# Altium PCB BMS_Slavee.PcbDoc (part 2 of 4)
Units mm, origin at the board's own origin, x right, y up, seen from the top; angles counter-clockwise.
Board outline 197.87 x 123.44 mm, 2 copper layers (Top Layer, Bottom Layer); 344 components, 178 nets, 953 pads, 755 vias.
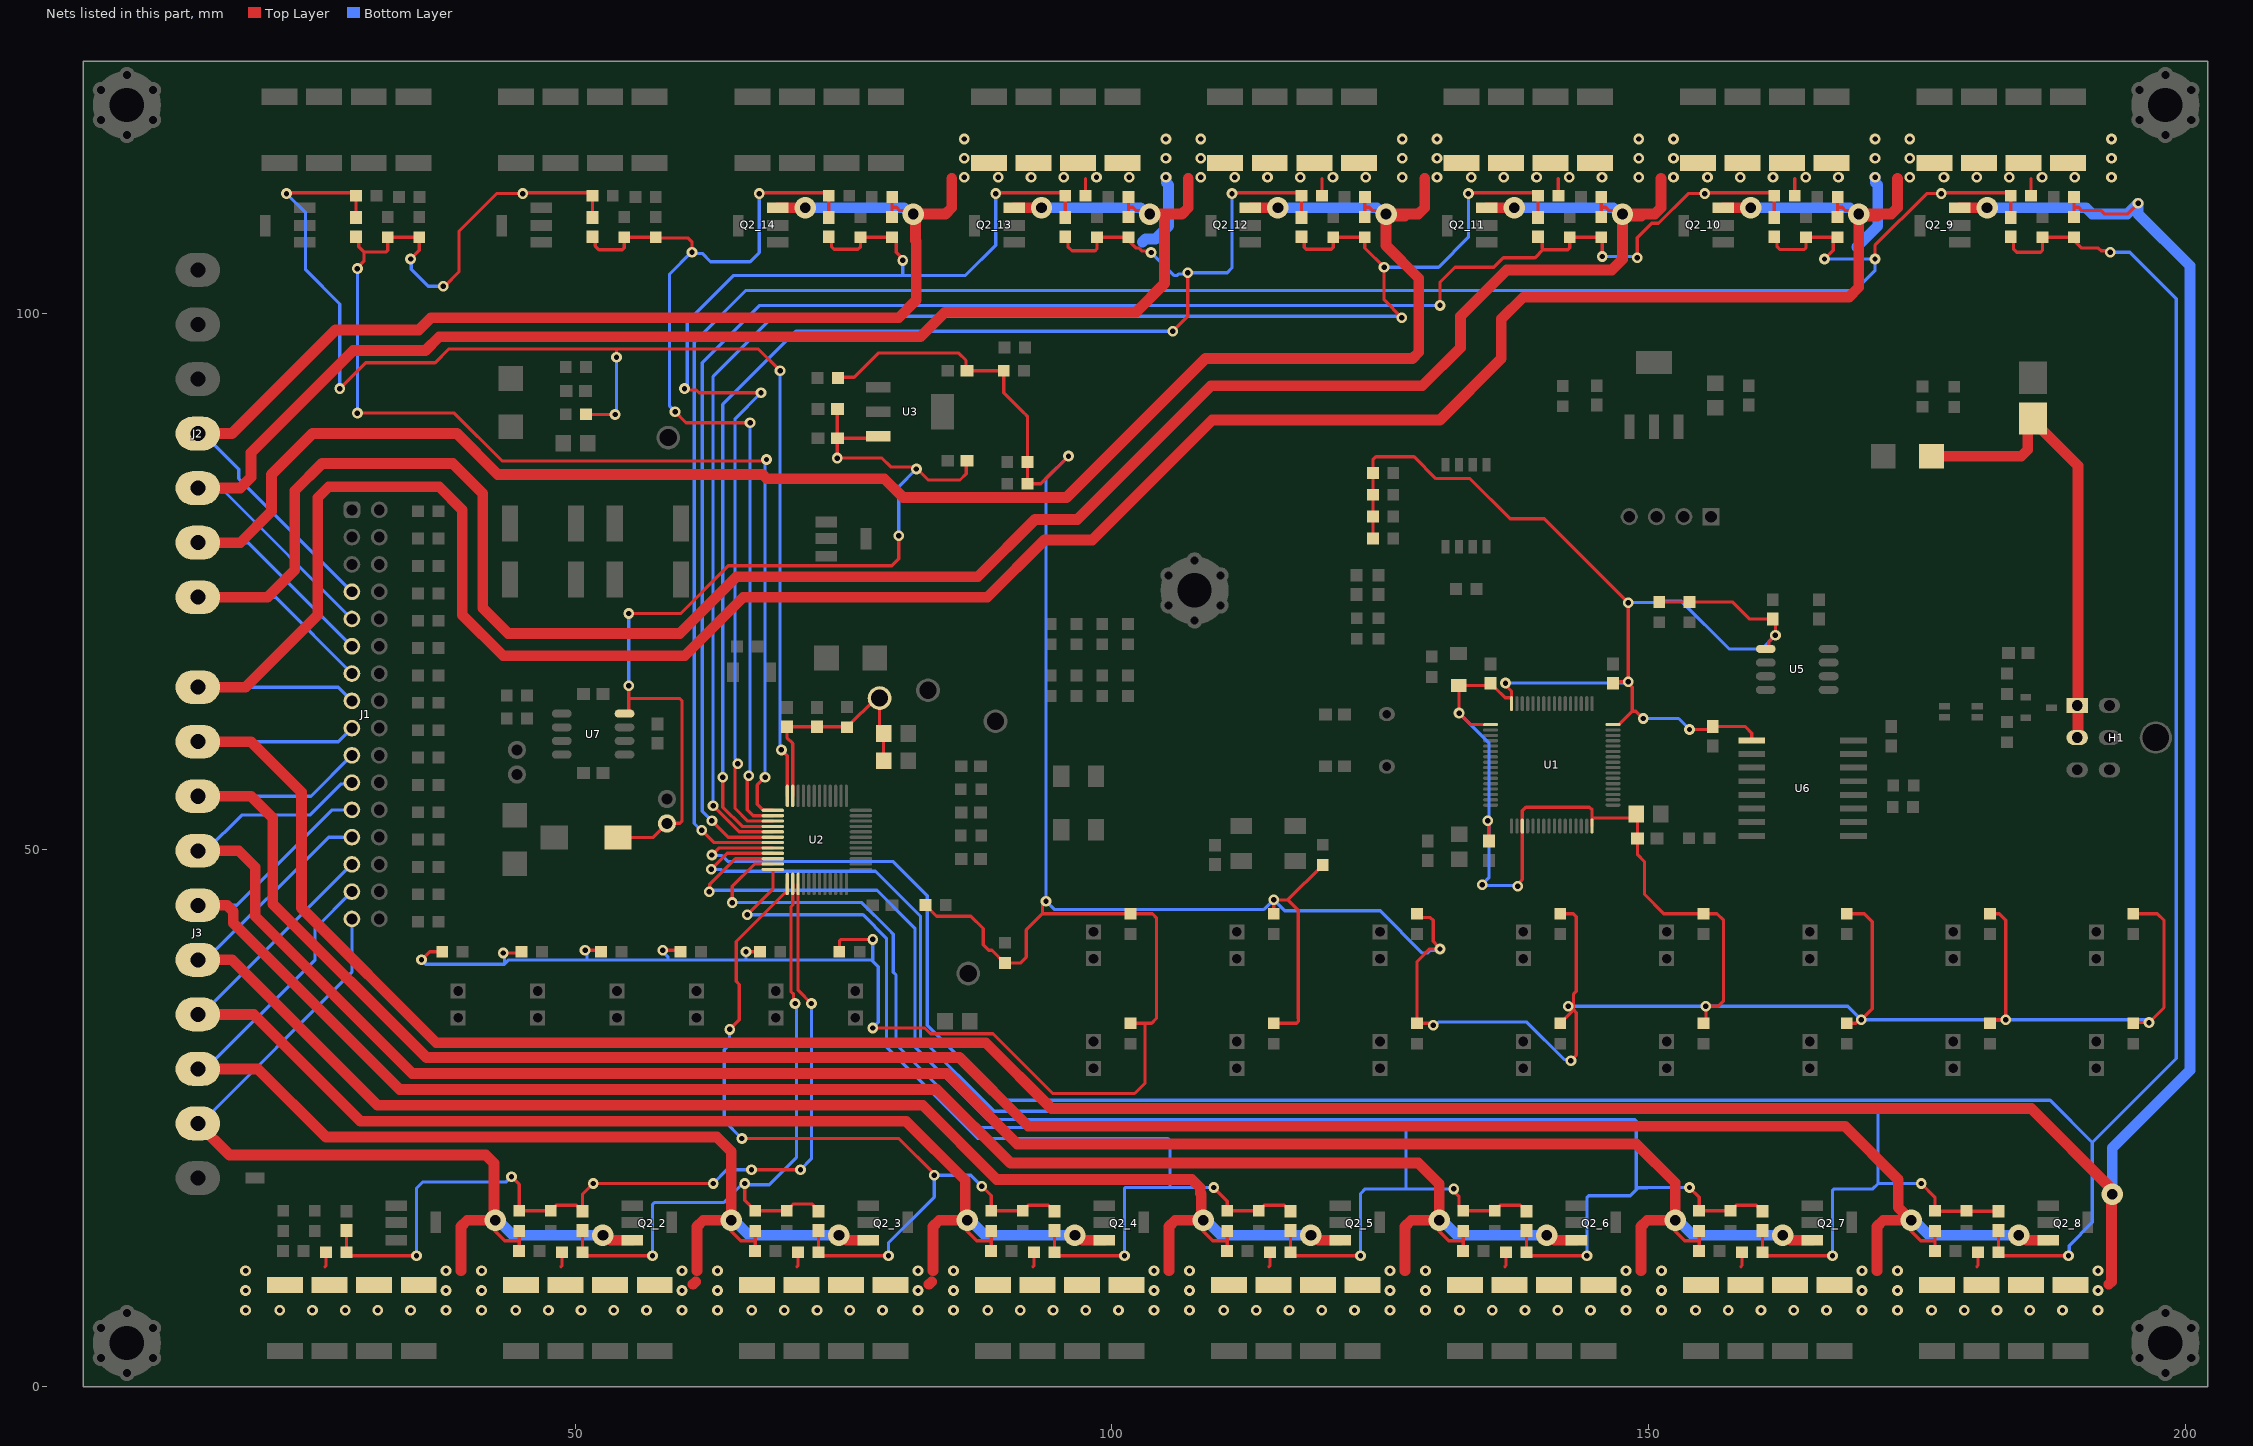
[diagram p2: the nets of this part, all layers, seen from the top]

## Part data
C1 C2 C3 C4 C5 C6 C8 C9 C10 C11 C12 C13 C14 C15 C16 C17 C18 C19 C20 C21 C22 C23 C24 C25_1 C25_2 C25_3 C25_4 C25_5 C25_6 C25_7 C25_8 C25_9 C25_10 C25_11 C25_12 C25_13 C25_14 C25_15 C25_16 C26 C27 C28 C29 C30 C31 C32 C39 C40 C41: library part Capacitor, "Capacitor", Published=8-Jun-2000, Publisher="Altium Limited"
  C1 C2 C3 C4 C5 C6 C8 C9 C10 C11 C12 C13 C14 C15 C16 C17 C18 C19 C20 C21 C22 C23 C24 C25_1 C25_2 C25_3 C25_4 C25_5 C25_6 C25_7 C25_8 C25_9 C25_10 C25_11 C25_12 C25_13 C25_14 C25_15 C25_16 C26 C27 C29 C30 C31 C32 C39 C40 C41: LatestRevisionDate=17-Jul-2002, LatestRevisionNote="Re-released for DXP Platform.", PackageReference=C0805
  C28: LatestRevisionDate=29-May-2009, LatestRevisionNote="IPC-7351 Footprint Added.", PackageDescription="Chip Capacitor", PackageReference=C1206
C7 C36: library part Capacitor, "100nF-0603", LatestRevisionDate=17-Jul-2002, LatestRevisionNote="Re-released for DXP Platform.", PackageReference=C0805, Published=8-Jun-2000, Publisher="Altium Limited"
C33 C34: library part "CAP 5*11"
C35: library part Capacitor, "1uF-0603", LatestRevisionDate=17-Jul-2002, LatestRevisionNote="Re-released for DXP Platform.", PackageReference=C0805, Published=8-Jun-2000, Publisher="Altium Limited"
C37 C38: library part Cap_Tan, "Tantalium Capacitor Size C", LatestRevisionDate=17-Jul-2002, LatestRevisionNote="Re-released for DXP Platform.", PackageReference=C0805, Published=8-Jun-2000, Publisher="Altium Limited"
D1 D2 D7: library part SS36
D3: library part CMP-0005740-3, "Diode, Zener, 4.7 V, 500 mW", Manufacturer="ON Semiconductor", PartNumber=MMSZ4697T1G, Power_W=500mW, Value1=0.5W, AEC Category=Q101, AEC Qualified=?, ComponentLink1Description="Datasheet link", ComponentLink1URL=http://www.onsemi.com/pub_link/Collateral/MMSZ4678T1-D.PDF, CompType=Zener, MountType=SMT, PackageReference=SOD-123, RJA_CperW=340, RoHS=Y, SizeArea_mm2=6.545, SizeAreaWB_mm2=13.095, SizeX_mm=3.85, SizeY_mm=1.7, SizeZ_mm=1.35, Vz_V=10V
D4: library part TVS, "transiebt voltage suppressor"
D8: library part SMBJ14ALK, "ESD protection diode / TVS diodes"
D9: library part SS34, "SS36 -Jled", Code_JEDEC=DO-214-AA, LatestRevisionDate=17-Jul-2002, LatestRevisionNote="Re-released for DXP Platform.", PackageReference=SMB, Published=8-Jun-2000, Publisher="Altium Limited"
H1: library part "HDR_mini_2 × 3", "Male Header 2X03"
J1: library part "Header 2*16 LED", "Header 2*16 LED 2mm"
J2: library part CONN_TB7, "CONN, TERMINAL BLOCK, 5.08mm pitch"
J3: library part CONN_TB10, "CONN, TERMINAL BLOCK, 5.08mm pitch"
L1: library part INDUCTOR, Code_IEC=1005, Code_JEITA=0402, LatestRevisionDate=17-Jul-2002, LatestRevisionNote="Re-released for DXP Platform.", PackageReference=0402-A, Published=8-Jun-2000, Publisher="Altium Limited"
L2: library part "line filter CMP-08256-000003-1", "CMC 200UH 70MA 2LN SMD", Impedance At Frequency="9.5kΩ @ 10MHz", Inductance=200uH, Manufacturer=TDK, Package=ACT1210L, Rms Current=70mA, Series Resistance=5.5Ω, Temperature="-40°C to +125°C", Temperature Range High=+125°C, Temperature Range Low=-40°C, Test Frequency=100kHz, Tolerance=-10/30%, Automotive=Yes, Automotive Grade="Grade 1", Category=Ind, ComponentLink2Description=Datasheet, ComponentLink2URL=https://product.tdk.com/info/en/catalog/datasheets/cmf_automotive_signal_act1210l-201_en.pdf, Composition=Wirewound, Device Class L1="Passive Components", Device Class L2="EMI / RFI Components", Device Class L3="Common Mode Chokes", Digikey Description="CMC 200UH 70MA 2LN SMD", Height=2.5mm, Lead Free=Yes, Manufacturer Part Number=ACT1210L-201-2P-TL00, Mouser Description="Ind Common Mode Choke 200uH 9.5KOhm 70mA 5.5Ohm -10% to 30% Wirewound 4-Pin 1210", Octopart=https://octopart.com/act1210l-201-2p-tl00-tdk-81014617, RoHS=TRUE
L3: library part "INDUCTOR 7*7"
LED1 LED2 LED3 LED4 LED5 LED6: library part LED, "LED", Adding Date=1387/12/22, Color=Red, Designer="Saeid Jorablo", Organazation=ControTec, Size="SMD 0603"
M1 M2 M3 M4 M5: library part MOUNTING
NT1: "Single point connection between nets.", Manufacturer=N/A, CompType=Net-Tie, MountType=SMT, PackageReference=N/A, PartNumber=N/A
PB1 RST1: library part Swtich-PB4, "4-Pin Push Button"
Q1 Q2_1 Q2_2 Q2_3 Q2_4 Q2_5 Q2_6 Q2_7 Q2_8 Q2_9 Q2_10 Q2_11 Q2_12 Q2_13 Q2_14 Q2_15 Q2_16: library part "BSR14, Nexperia", "BJT 30V 3A 40V 10W SI-NPN", Manufacturer=Nexperia, PartNumber=BSR14, Supplier Part Number 1=568-6225-1-ND, Value1="0.8 A", Value2=300, AEC Category=Q101, AEC Qualified=?, ComponentLink1Description="Datasheet link", ComponentLink1URL=http://www.nexperia.com/documents/data_sheet/BSR13_BSR14.pdf, CompType=BJT, HfeMax=300, IcRated_A=0.8, LatestRevisionDate=2017-06-09, MountType=SMT, NPN=1, PackageReference=SOT-23, PNP=0, Published=2008-07-31, Publisher="Texas Instruments", RoHS=Y, SizeArea_mm2=7.5, SizeAreaWB_mm2=14, SizeX_mm=2.5, SizeY_mm=3, SizeZ_mm=1.1, Supplier 1=Digi-Key, SymbolVersion=2008-07-31, TaMax_C=150, TaMin_C=-65, U/M=EA, Vceo_V=40, Vcesat1_V=0.3
R1 R2 R29 R34 R35 R36 R37 R38 R39 R48 R49 R50 R51 R54 R56 R57 R58 R64 R65 R70: library part Res, "Resistor", LatestRevisionDate=17-Jul-2002, LatestRevisionNote="Re-released for DXP Platform.", PackageDescription="Axial Device, Thru-Hole; 2 Leads; 0.3 in Pin Spacing", PackageReference=AXIAL-0.3, Published=8-Jun-2000, Publisher="Altium Limited"
R3 R4 R5 R6 R7 R8 R9 R10 R11 R12 R13 R14 R15 R16 R17 R18 R19 R20 R21 R22 R23 R24 R25 R26 R27 R28 R40_1 R40_2 R40_3 R40_4 R40_5 R40_6 R40_7 R40_8 R40_9 R40_10 R40_11 R40_12 R40_13 R40_14 R40_15 R40_16 R41_1 R41_2 R41_3 R41_4 R41_5 R41_6 R41_7 R41_8 R41_9 R41_10 R41_11 R41_12 R41_13 R41_14 R41_15 R41_16 R42_1 R42_2 R42_3 R42_4 R42_5 R42_6 R42_7 R42_8 R42_9 R42_10 R42_11 R42_12 R42_13 R42_14 R42_15 R42_16 R43_1 R43_2 R43_3 R43_4 R43_5 R43_6 R43_7 R43_8 R43_9 R43_10 R43_11 R43_12 R43_13 R43_14 R43_15 R43_16 R44_1 R44_2 R44_3 R44_4 R44_5 R44_6 R44_7 R44_8 R44_9 R44_10 R44_11 R44_12 R44_13 R44_14 R44_15 R44_16 R45_1 R45_2 R45_3 R45_4 R45_5 R45_6 R45_7 R45_8 R45_9 R45_10 R45_11 R45_12 R45_13 R45_14 R45_15 R45_16 R46_1 R46_2 R46_3 R46_4 R46_5 R46_6 R46_7 R46_8 R46_9 R46_10 R46_11 R46_12 R46_13 R46_14 R46_15 R46_16 R47_1 R47_2 R47_3 R47_4 R47_5 R47_6 R47_7 R47_8 R47_9 R47_10 R47_11 R47_12 R47_13 R47_14 R47_15 R47_16 R52 R53 R55_1 R55_2 R55_3 R55_4 R55_5 R55_6 R55_7 R55_8 R55_9 R55_10 R55_11 R55_12 R55_13 R55_14 R55_15 R55_16 R55_17 R55_18 R55_19 R55_20 R55_21 R55_22 R60 R62: library part Resistor, "0603,0.1W", LatestRevisionDate=17-Jul-2002, LatestRevisionNote="Re-released for DXP Platform.", PackageReference=AXIAL-0.5, Published=8-Jun-2000, Publisher="Altium Limited"
R30 R31 R32 R33: library part Resistor_2, "0603,0.1W", LatestRevisionDate=17-Jul-2002, LatestRevisionNote="Re-released for DXP Platform.", PackageReference=AXIAL-0.5, Published=8-Jun-2000, Publisher="Altium Limited"
R63: library part Resistor, "100K-0603", LatestRevisionDate=17-Jul-2002, LatestRevisionNote="Re-released for DXP Platform.", PackageReference=AXIAL-0.5, Published=8-Jun-2000, Publisher="Altium Limited"
R73: library part Resistor, "300K-0603", LatestRevisionDate=17-Jul-2002, LatestRevisionNote="Re-released for DXP Platform.", PackageReference=AXIAL-0.5, Published=8-Jun-2000, Publisher="Altium Limited"
SWD1: library part Header1*4, "Header, 4-Pin"
SWL1: "GDH04S04=DIP SWITCH", Manufacturer_Name="TE Connectivity", Copyright="Copyright (C) 2025 Ultra Librarian. All rights reserved.", Manufacturer_Part_Number=1571983-4, RefDes=RefDes, Type=Type
TP1 TP2 TP3 TP4 TP7: "TEST POINT.  No entry in BOM.", Manufacturer=N/A, CompType=Testpoint, PackageReference=N/A, PartNumber=N/A
TS_1 TS_2 TS_3 TS_4 TS_5 TS_6 TS_7 TS_8 TS_9 TS_10 TS_11 TS_12 TS_13 TS_14 TS_15 TS_16 TS_17 TS_18 TS_19 TS_20 TS_21 TS_22: library part "Header1*2 XN", "Header, 2-Pin XN"
U1: "ARM Cortex-M3 32-bit MCU, 512 KB Flash, 64 KB Internal RAM, 51 I/Os, 64-pin LQFP, -40 to 85 degC, Tray", I/Os (High Current)=51, Operating Frequency(F) (Processor speed) (MHz)=72, Supplier Part Number 1=497-6444-ND, Supply Voltage(Vcc) min (V)=2, A/D Converter="3x12-bit (16 Channel)", ComponentLink1Description="Manufacturer URL", ComponentLink1URL=http://www.st.com/web/en/home.html, ComponentLink2Description=Datasheet, ComponentLink2URL=http://www.st.com/st-web-ui/static/active/en/resource/technical/document/datasheet/CD00191185.pdf, ComponentLink3Description="Package Specification", ComponentLink3URL=http://www.st.com/st-web-ui/static/active/en/resource/technical/document/datasheet/DM00037051.pdf, Core="ARM Cortex-M3", D/A Converter="2x12-bit (2 Channel)", DatasheetVersion="Rev. 8", FLASH Size (Prog) (kB)=512, Internal RAM Size (kB)=64, Mounting Technology="Surface Mount", PackageDescription="64-Pin Low Profile Quad Flat Package, 10 x 10 mm Body, 0.5 mm Pitch", PackageReference=LQFP64, PackageVersion="Rev. 4, 06/2013", Packing=Tray, PartNumber=STM32F103RET6, Supplier 1=Digi-Key, Supplier 2=Farnell, Supplier 3=Newark, Supplier 4=Newark, Supplier 5=Mouser, Supplier Part Number 2=1624138, Supplier Part Number 3=01P4101, Supplier Part Number 4=57P1231, Supplier Part Number 5=511-STM32F103RET6
U2: library part bq76952, "Multicell Battery Monitor and Protection Family, PFB0048A (TQFP-48)", Alternate Manufacturer="Texas Instruments", Alternate PartNumber=bq76952PFBR, AEC Category=Q200, AEC Qualified=N, ComponentLink1Description="Datasheet Link", ComponentLink1URL=http://www.ti.com/lit/ds/symlink/bq76952.pdf, ComponentLink2Description="Product Folder", ComponentLink2URL=http://www.ti.com/product/bq76952, ComponentLink3Description="Online Datasheet", ComponentLink3URL=http://www.ti.com/product/bq76952/datasheet, CompType=IC, Manufacturer="Texas Instruments", MountType=SMT, PackageDescription=TQFP-48, PackageReference=PFB0048A, PartNumber=bq76952PFBT, SizeArea_mm2=81, SizeAreaWB_mm2=121, SizeX_mm=9, SizeY_mm=9, SizeZ_mm=1.2
U3: library part AMS1117, "High Accuracy, Ultralow IQ, 1.5 A, anyCAP Low Dropout Regulator"
U4: library part AMS1117, "NCP1117ST50T3G LDO 5V"
U5: "Isolated CAN Transceiver, -55 to 105 degC, 8-pin SOP (DUB), Green (RoHS & no Sb/Br)", Drivers Per Package=1, Manufacturer="Texas Instruments", Rating=Catalog, ComponentLink1Description=Datasheet, ComponentLink1URL=http://www.ti.com/general/docs/lit/getliterature.tsp?genericPartNumber=ISO1050&fileType=pdf, ComponentLink2Description="Package Specification", ComponentLink2URL=http://www.ti.com/litv/pdf/mpds247b, DatasheetVersion=SLLS983E, Eco-Plan="Green (RoHS & no Sb/Br)", Isolated=Yes, Mounting Technology="Surface Mount", PackageDescription="8-Pin Small Outline Package 2.54 mm Pitch", PackageReference=DUB0008A, PackageVersion="revC, May-2006", PartNumber=ISO1050DUBR, SubFamily=CAN
U6: "200-Kbps, half-duplex, 2.5-kVrms isolated RS-485 & RS-422 transceiver 16-SOIC -40 to 85", Manufacturer_Name="Texas Instruments", Copyright="Copyright (C) 2025 Ultra Librarian. All rights reserved.", Manufacturer_Part_Number=ISO3082DW, RefDes=RefDes, Type=Type
U7: library part MAX5033, "High-Efficiency, MAXPower    Step-Down DC-DC Converter"

## Via types
v1: diameter 1, hole 0.5, Top Layer to Bottom Layer, tented both sides, 697 vias
v2: diameter 2, hole 1, Top Layer to Bottom Layer, tented both sides, 58 vias

## Nets (pads, with @x,y where several pads share a name; then routed paths per layer and width w, separated by ;. In a path a pad name is that pad's centre, name@x,y a point inside that pad or via, vN(x,y) a via of type N, cw(c..) or ccw(c..) an arc to the next point about the centre after c; other vN are vias at no path point)
3.3V: C6.1 C8.1 C9.1 C10.1 C17.2 C30.2 C37.1 C40.2 L1.1 R2.2 R3.2 R4.2 R36.1 R37.1 R48.1 R51.1 R52.2 R54.1 R55_1.2 R55_2.2 R55_3.2 R55_4.2 R55_5.2 R55_6.2 R55_7.2 R55_8.2 R55_9.2 R55_10.2 R55_11.2 R55_12.2 R55_13.2 R55_14.2 R55_15.2 R55_16.2 R55_17.2 R55_18.2 R55_19.2 R55_20.2 R55_21.2 R55_22.2 R60.2 R62.2 R64.2 R70.2 U1.1 U1.19 U1.32 U1.48 U1.64 U5.1 U6.1 | length 612
  Top Layer w0.3: v1(35.687,39.751) 36.449,40.513 R55_17.2@37.62,40.513 ; v1(43.307,40.386) 44.89,40.386 R55_18.2@45.017,40.513 ; v1(50.927,40.64) 52.288,40.64 R55_19.2@52.415,40.513 ; v1(58.166,40.64) 59.686,40.64 R55_20.2@59.813,40.513 ; v1(65.913,40.513) R55_21.2@67.21,40.513 ; R2.2@74.473,93.962 74.523,94.012 75.978,94.012 78.232,96.266 85.725,96.266 86.409,95.582 86.409,94.665 86.459,94.615 R37.1@89.921,94.615 89.921,92.578 91.821,90.678 ; R55_22.2@74.608,40.513 74.611,40.516 74.611,41.48 74.787,41.656 v1(77.724,41.656) ; v1(77.724,33.401) 82.57,33.401 83.101,32.87 88.923,32.87 94.488,27.305 102.108,27.305 103.084,28.281 103.084,33.756 102.997,33.843 ; R70.2@82.626,44.849 83.66,43.815 86.868,43.815 88.011,42.672 88.011,41.148 88.519,40.64 88.831,40.64 R64.2@90.025,39.446 91.455,39.446 92.014,40.005 92.014,42.545 93.52,44.051 ; 91.984,90.515 92.146,90.353 R54.1@92.146,86.124 R51.1@92.146,84.092 93.368,84.092 v1(95.951,86.675) ; v1(93.853,45.212) 93.52,44.879 93.52,44.051 ; R55_1.2@101.727,33.843 102.997,33.843 ; R55_2.2@115.071,33.843 117.195,33.843 117.371,34.019 117.371,34.267 117.348,34.29 117.348,44.384 116.393,45.339 ; R55_10.2@115.071,44.051 115.062,44.06 v1(115.062,45.339) 116.393,45.339 ; R52.2@119.634,48.58 116.393,45.339 ; R62.2@124.307,79.012 R60.2@124.307,81.044 R4.2@124.307,83.076 R3.2@124.307,85.108 124.307,86.334 124.587,86.614 128.143,86.614 130.175,84.582 133.35,84.582 137.096,80.835 140.272,80.835 v1(148.082,73.025) v1(148.082,65.659) ; R55_11.2@128.415,44.051 128.778,43.688 129.667,43.688 129.921,43.434 129.921,41.475 130.364,41.032 130.364,40.883 v1@130.248,40.767 ; v1(129.921,33.655) 129.733,33.843 R55_3.2@128.415,33.843 128.415,39.579 129.602,40.767 v1@130.248,40.767 ; v1(130.556,40.767) v1@130.248,40.767 ; v1(135.001,52.705) 135.128,52.578 C9.1@135.128,50.811 ; U1.1@135.27,61.662 133.41,61.662 v1(132.334,62.738) 132.334,65.252 L1.1@132.284,65.302 135.036,65.302 C10.1@135.255,65.521 135.255,65.471 135.655,65.071 135.705,65.071 136.62,64.156 U1.64@137.22,64.156 ; v1(136.652,65.532) 136.652,65.343 137.22,64.775 U1.64@137.22,64.156 ; U1.64@137.22,63.612 U1.64@137.22,64.156 ; v1(137.795,46.609) 137.795,46.798 138.22,47.223 U1.19@138.22,52.212 138.22,53.638 138.557,53.975 144.477,53.975 144.72,53.732 144.72,52.972 ; R55_4.2@141.759,33.843 143.002,35.086 ; R55_12.2@141.759,44.051 142.984,44.051 143.256,43.779 143.256,36.83 143.002,36.576 143.002,35.086 ; v1(142.494,35.433) 142.655,35.433 143.002,35.086 ; v1(142.748,30.353) 142.748,30.371 143.256,30.879 143.256,34.832 143.002,35.086 ; U1.32@144.72,52.212 144.72,52.972 ; U1.48@146.67,61.662 147.22,61.662 148.463,62.905 ; C6.1@146.685,65.521 146.823,65.659 v1(148.082,65.659) ; v1(149.479,62.23) 148.804,62.905 148.463,62.905 ; R36.1@150.985,73.096 R48.1@153.797,73.096 157.79,73.096 159.396,71.49 C30.2@161.544,71.49 161.798,71.236 v1(161.798,69.977) 161.177,69.356 161.177,68.915 160.969,68.707 U5.1@160.905,68.707 ; v1(153.797,61.214) 155.685,61.214 C40.2@155.956,61.485 158.987,61.485 159.604,60.868 U6.1@159.604,60.198 ; R55_5.2@155.103,33.843 155.321,34.061 v1(155.321,35.433) 156.464,35.433 156.972,35.941 156.972,43.434 156.355,44.051 R55_13.2@155.103,44.051 151.402,44.051 149.606,45.847 149.606,48.895 148.96,49.541 C8.1@148.96,51.054 148.96,53.217 C37.1@148.837,53.34 148.469,52.972 144.72,52.972 ; R55_6.2@168.447,33.843 169.3,33.843 169.62,34.163 v1(169.799,34.163) 170.815,35.179 170.815,43.307 170.071,44.051 R55_14.2@168.447,44.051 ; R55_7.2@181.79,33.843 182.11,34.163 v1(183.261,34.163) 183.261,43.434 182.644,44.051 R55_15.2@181.79,44.051 ; R55_8.2@195.134,33.843 195.2,33.909 v1(196.596,33.909) 197.993,35.306 197.993,43.434 197.376,44.051 R55_16.2@195.134,44.051 ; 93.52,44.051 R55_9.2@101.727,44.051 103.777,44.051 104.14,43.688 104.14,34.29 103.693,33.843 102.997,33.843 ; v1(148.082,65.659) 148.082,65.514 148.463,65.133 148.463,62.905
  Bottom Layer w0.3: v1(35.687,39.751) 36.088,39.35 43.414,39.35 ; v1(43.307,40.386) 43.414,40.279 43.414,39.35 ; v1(50.927,40.64) 51.113,40.454 51.113,39.751 ; v1(58.166,40.64) 58.166,40.489 58.655,40 58.655,39.751 ; v1(65.913,40.513) 65.913,39.751 ; v1(77.724,33.401) 77.724,33.419 78.232,33.927 78.232,39.124 77.724,39.632 ; v1(77.724,41.656) 77.724,39.632 ; v1(95.951,86.675) 93.853,84.577 v1(93.853,45.212) 94.615,44.45 114.173,44.45 v1(115.062,45.339) 116.078,44.323 124.982,44.323 128.919,40.386 129.386,40.386 129.633,40.633 130.422,40.633 v1(130.556,40.767) ; v1(129.921,33.655) 130.11,33.655 130.408,33.953 138.64,33.953 142.122,30.471 142.63,30.471 v1(142.748,30.353) ; v1(132.334,62.738) 135.128,59.944 135.128,47.444 134.493,46.809 v1(134.493,46.736) 134.556,46.672 137.731,46.672 v1(137.795,46.609) ; v1(136.652,65.532) 147.955,65.532 v1(148.082,65.659) ; v1(142.494,35.433) v1(155.321,35.433) 168.529,35.433 v1(169.799,34.163) v1(183.261,34.163) 196.342,34.163 v1(196.596,33.909) ; v1(148.082,73.025) 151.257,73.025 151.384,73.152 153.035,73.152 157.48,68.707 160.528,68.707 v1(161.798,69.977) ; v1(149.479,62.23) 152.781,62.23 v1(153.797,61.214) ; 43.414,39.35 43.815,39.751 51.113,39.751 ; 51.113,39.751 58.655,39.751 ; 58.655,39.751 65.913,39.751 ; 65.913,39.751 77.605,39.751 77.724,39.632
5V: C16.2 C18.2 C19.2 C34.2 L3.2 U3.3 U7.4 | length 91.6
  Top Layer w0.3: L3.2@53.993,51.137 57.233,51.137 C34.2@58.547,52.451 58.577,52.481 59.768,52.481 59.944,52.657 59.944,63.91 59.768,64.085 54.991,64.085 ; U7.4@54.604,62.685 54.783,62.685 54.991,62.893 54.991,64.085 ; v1(54.991,65.278) 54.991,64.085 ; v1(54.991,72.009) 59.817,72.009 64.262,76.454 79.502,76.454 80.144,77.096 80.144,79.241 v1(80.137,79.248) ; C18.2@74.422,91.048 v1(74.422,86.487) 78.58,86.487 79.404,85.662 81.597,85.662 v1(81.788,85.471) 81.853,85.471 82.874,84.45 85.849,84.45 86.435,85.036 86.435,86.183 86.485,86.233 C16.2@86.509,86.233 ; C19.2@74.433,88.328 77.442,88.328 77.628,88.515 U3.3@78.228,88.515 ; C16.2@86.559,86.233 C16.2@86.609,86.283
  Bottom Layer w0.3: v1(54.991,65.278) v1(54.991,72.009) ; v1(80.137,79.248) 80.137,83.82 v1(81.788,85.471)
12V: D7.1 D8.1 H1.1 H1.2 | length 42.5
  Top Layer w1: D7.1@176.331,86.671 184.707,86.671 185.293,87.257 185.293,89.535 D8.1@185.547,89.789 ; D8.1@185.801,90.17 185.801,89.97 189.992,85.779 189.992,61.214
+BalanceCommand_1: C25_1.2 C25_2.1 R40_1.2 R45_2.2 R47_2.2 U2.15 | length 84.4
  Top Layer w0.3: C25_1.2@28.702,14.537 R40_1.2@28.702,12.516 29.026,12.192 v1(35.226,12.192) ; v1(44.069,19.558) 44.79,18.837 R47_2.2@44.79,16.387 R45_2.2@47.724,16.387 48.228,16.891 50.107,16.891 50.212,16.787 50.283,16.787 C25_2.1@50.683,16.387 ; C25_2.1@50.683,16.337 C25_2.1@50.683,16.387 ; v1(62.865,18.923) v1(51.689,18.923) 50.683,17.917 C25_2.1@50.683,16.387 ; v1(66.421,20.193) v1(70.993,20.193) ; U2.15@70.767,46.827 70.767,36.929 v1(72.009,35.687)
  Bottom Layer w0.3: v1(35.226,12.192) 35.226,18.493 35.783,19.05 43.543,19.05 44.051,19.558 v1(44.069,19.558) ; v1(62.865,18.923) 64.135,20.193 v1(66.421,20.193) ; v1(70.993,20.193) 72.009,21.209 v1(72.009,35.687)
+BalanceCommand_2: C25_2.2 C25_3.1 R40_2.2 R45_3.2 R47_3.2 U2.14 | length 64.2
  Top Layer w0.3: C25_2.2@50.683,14.537 R40_2.2@50.683,12.516 51.007,12.192 v1@57.449,12.192 ; v1(65.79,18.923) 65.79,17.368 R47_3.2@66.771,16.387 R45_3.2@69.705,16.387 70.336,17.018 72.033,17.018 72.664,16.387 C25_3.1@72.664,16.337 ; U2.14@70.267,46.827 70.267,44.867 70.104,44.704 70.104,36.787 70.351,36.54 70.351,35.821 v1(70.485,35.687)
  Bottom Layer w0.3: v1(57.207,12.192) 57.207,16.969 57.383,17.145 63.823,17.145 65.601,18.923 v1(65.79,18.923) 65.917,18.796 68.072,18.796 70.612,21.336 70.612,35.56 v1(70.485,35.687)
+BalanceCommand_3: C25_3.2 C25_4.1 R40_3.2 R45_4.2 R47_4.2 U2.13 | length 78.7
  Top Layer w0.3: v1(64.389,33.274) 65.293,34.178 65.293,37.458 65.009,37.742 65.009,41.46 69.497,45.948 69.767,45.948 U2.13@69.767,46.827 ; v1(65.532,23.114) 80.137,23.114 83.439,19.812 v1(83.439,19.685) ; C25_3.2@72.664,14.537 R40_3.2@72.664,12.516 72.988,12.192 v1@79.43,12.192 ; v1(87.884,18.669) 88.752,17.801 R47_4.2@88.752,16.387 R45_4.2@91.686,16.387 92.19,16.891 94.069,16.891 94.174,16.787 94.245,16.787 94.645,16.387 C25_4.1@94.645,16.337
  Bottom Layer w0.3: v1(64.389,33.274) 64.389,31.877 63.881,31.369 63.881,24.765 v1(65.532,23.114) ; v1(79.188,12.192) 79.188,13.402 83.439,17.653 v1(83.439,19.685) 86.868,19.685 v1(87.884,18.669)
+BalanceCommand_4: C25_4.2 C25_5.1 R40_4.2 R45_5.2 R47_5.2 U2.12 | length 96.2
  Top Layer w0.3: v1(66.04,43.942) 68.417,46.319 U2.12@68.417,48.177 ; C25_4.2@94.645,14.537 R40_4.2@94.645,12.516 94.969,12.192 v1(101.169,12.192) v1@101.411,12.192 ; v1(109.474,18.542) 110.733,17.283 R47_5.2@110.733,16.387 R45_5.2@113.667,16.387 114.171,16.891 116.05,16.891 116.155,16.787 116.226,16.787 116.626,16.387 C25_5.1@116.626,16.337
  Bottom Layer w0.3: v1(66.04,43.942) 66.055,43.957 76.82,43.957 78.994,41.783 78.994,41.148 79.009,41.133 79.009,31.608 87.503,23.114 105.234,23.114 105.41,22.938 105.41,18.542 101.345,18.542 ; v1(101.169,12.192) 101.169,18.493 101.218,18.542 101.315,18.542 ; 105.44,18.542 v1(109.474,18.542)
+BalanceCommand_5: C25_5.2 C25_6.1 R40_5.2 R45_6.2 R47_6.2 U2.11 | length 121.4
  Top Layer w0.3: v1(64.643,45.085) 64.643,46.609 66.711,48.677 U2.11@68.417,48.677 ; C25_5.2@116.626,14.537 R40_5.2@116.626,12.516 116.95,12.192 v1@123.392,12.192 ; v1(131.826,18.415) 131.826,18.226 132.314,17.737 132.314,16.787 R47_6.2@132.714,16.387 R45_6.2@135.648,16.387 136.152,16.891 138.031,16.891 138.136,16.787 138.207,16.787 138.607,16.387 C25_6.1@138.607,16.337
  Bottom Layer w0.3: v1(64.643,45.085) 76.708,45.085 79.233,42.56 79.233,42.552 79.629,42.156 79.629,38.6 79.883,38.346 79.883,31.877 87.63,24.13 127.205,24.13 127.381,23.954 127.381,18.542 127.508,18.415 ; v1(123.15,12.192) 123.15,17.985 123.58,18.415 127.381,18.415 127.508,18.415 ; v1(131.826,18.415) 127.508,18.415
+BalanceCommand_6: C25_6.2 C25_7.1 R40_6.2 R45_7.2 R47_7.2 U2.10 | length 146.8
  Top Layer w0.3: v1(62.484,46.101) 62.538,46.155 62.538,46.79 64.925,49.177 U2.10@67.528,49.177 ; C25_6.2@138.607,14.537 R40_6.2@138.607,12.516 138.931,12.192 v1@144.158,12.192 ; v1(153.797,18.542) 154.695,17.644 R47_7.2@154.695,16.387 R45_7.2@157.629,16.387 158.133,16.891 160.012,16.891 160.117,16.787 160.188,16.787 160.588,16.387 C25_7.1@160.588,16.337
  Bottom Layer w0.3: v1(62.484,46.101) 62.611,46.228 78.113,46.228 81.041,43.3 81.041,43.292 81.669,42.664 81.669,31.615 88.392,24.892 148.668,24.892 148.844,24.716 148.844,18.351 ; v1(144.242,12.192) 144.242,17.604 144.418,17.78 148.273,17.78 148.844,18.351 ; v1(153.797,18.542) 149.913,18.542 149.897,18.526 149.018,18.526 148.844,18.351
+BalanceCommand_7: C25_7.2 C25_8.1 R40_7.2 R45_8.2 R47_8.2 U2.9 | length 170.2
  Top Layer w0.3: v1(62.67,48.201) 62.694,48.201 64.17,49.677 U2.9@68.417,49.677 ; C25_7.2@160.588,14.537 R40_7.2@160.588,12.516 160.912,12.192 v1@167.354,12.192 ; v1(175.387,18.923) 176.657,17.653 176.657,16.406 176.726,16.337 C25_8.1@182.569,16.337
  Bottom Layer w0.3: v1(62.67,48.201) 62.715,48.156 63.62,48.156 63.77,48.006 77.978,48.006 82.169,43.815 82.169,32.512 89.027,25.654 171.191,25.654 171.366,25.478 171.366,18.923 ; v1(167.112,12.192) 167.112,18.239 167.288,18.415 170.858,18.415 171.366,18.923 ; v1(175.387,18.923) 171.366,18.923
+BalanceCommand_8: C25_8.2 C25_9.1 R40_8.2 R45_9.2 R47_9.2 U2.8 | length 281
  Top Layer w0.3: v1(62.738,49.523) 62.774,49.523 63.428,50.177 U2.8@68.417,50.177 ; C25_8.2@182.569,14.537 R40_8.2@182.569,12.516 182.893,12.192 183.782,12.192 ; C25_9.1@183.717,107.107 183.971,106.853 183.971,105.97 184.277,105.664 186.5,105.664 186.676,105.84 R45_9.2@186.676,107.057 R47_9.2@189.309,107.057 ; v1@189.335,12.192 183.782,12.192 ; v1@189.357,12.192 183.782,12.192 ; R47_9.2@189.61,107.057 R47_9.2@189.309,107.057 ; v1(192.988,105.664) 192.854,105.798 192.135,105.798 191.888,106.045 190.321,106.045 R47_9.2@189.309,107.057
  Bottom Layer w0.3: v1(62.738,49.523) 62.792,49.469 63.688,49.469 64.254,48.903 79.621,48.903 82.804,45.72 82.804,33.655 89.789,26.67 187.382,26.67 191.314,22.738 ; v1(189.093,12.192) 189.164,12.263 189.164,13.142 191.314,15.292 191.314,22.738 ; v1(192.988,105.664) 194.818,105.664 199.136,101.346 199.136,30.561 191.314,22.738
+BalanceCommand_9: C25_9.2 C25_10.1 R40_9.2 R45_10.2 R47_10.2 U2.7 | length 199.7
  Top Layer w0.3: v1(61.802,51.831) 62.956,50.677 U2.7@68.417,50.677 ; C25_10.1@161.699,107.107 161.953,106.853 161.953,106.172 162.207,105.918 164.482,105.918 164.658,106.094 R45_10.2@164.658,107.057 R47_10.2@167.291,107.057 ; v1(166.37,105.029) 167.192,105.851 167.192,106.958 R47_10.2@167.291,107.057 ; R47_10.2@167.592,107.057 R47_10.2@167.291,107.057 ; v1(171.069,105.029) 171.069,106.299 175.895,111.125 v1(177.24,111.125) 177.328,111.213 183.432,111.213 R40_9.2@183.717,110.928 C25_9.2@183.717,108.907
  Bottom Layer w0.3: v1(61.802,51.831) 61.707,51.831 61.087,52.451 61.087,97.282 65.913,102.108 169.242,102.108 171.069,103.935 v1(171.069,105.029) v1(166.37,105.029)
+BalanceCommand_10: C25_10.2 C25_11.1 R40_10.2 R45_11.2 R47_11.2 U2.6 | length 165.1
  Top Layer w0.3: v1(62.738,52.705) 64.266,51.177 U2.6@68.417,51.177 ; v1(130.556,100.711) 130.556,102.87 131.953,104.267 135.571,104.267 136.46,105.156 139.413,105.156 140.182,105.925 140.081,106.026 ; C25_11.1@139.681,107.107 140.081,106.707 140.081,106.026 ; R47_11.2@145.574,107.057 R47_11.2@145.273,107.057 ; v1(145.669,105.267) 145.669,106.661 R47_11.2@145.273,107.057 ; v1(148.939,105.156) 148.939,107.029 150.28,108.37 150.91,108.37 153.665,111.125 v1(155.222,111.125) 155.31,111.213 161.414,111.213 R40_10.2@161.699,110.928 C25_10.2@161.699,108.907 ; 140.081,106.026 140.204,105.903 142.464,105.903 142.64,106.079 R45_11.2@142.64,107.057 R47_11.2@145.273,107.057
  Bottom Layer w0.3: v1(62.738,52.705) 61.849,53.594 61.849,95.377 67.183,100.711 v1(130.556,100.711) ; v1(145.669,105.267) 148.828,105.267 v1(148.939,105.156)
+BalanceCommand_11: C25_11.2 C25_12.1 R40_11.2 R45_12.2 R47_12.2 U2.5 | length 151.6
  Top Layer w0.3: v1(62.85,54.102) 65.275,51.677 U2.5@68.417,51.677 ; C25_12.1@117.663,107.107 117.917,106.853 117.917,106.11 118.093,105.934 120.446,105.934 120.622,106.11 R45_12.2@120.622,107.057 R47_12.2@123.556,107.057 123.556,106.06 v1(125.349,104.267) 125.349,101.219 v1(127,99.568) ; v1(133.204,111.125) 133.292,111.213 139.396,111.213 R40_11.2@139.681,110.928 C25_11.2@139.681,108.907
  Bottom Layer w0.3: v1(62.85,54.102) 62.85,94.092 68.453,99.695 126.873,99.695 v1(127,99.568) ; v1(125.349,104.267) 130.429,104.267 133.204,107.042 v1(133.204,111.125)
+BalanceCommand_12: C25_12.2 C25_13.1 R40_12.2 R45_13.2 R47_13.2 U2.4 | length 129
  Top Layer w0.3: v1(63.754,56.769) 63.754,53.975 65.552,52.177 U2.4@68.417,52.177 ; C25_13.1@95.645,107.107 95.899,106.853 95.899,106.172 96.28,105.791 98.428,105.791 98.604,105.967 R45_13.2@98.604,107.057 R47_13.2@101.237,107.057 ; R47_13.2@101.538,107.057 R47_13.2@101.237,107.057 ; v1(103.648,105.632) 103.514,105.766 102.827,105.766 102.548,106.045 102.249,106.045 R47_13.2@101.237,107.057 ; v1(105.664,98.298) 107.061,99.695 v1(107.061,103.759) ; v1(111.186,111.125) 111.274,111.213 117.378,111.213 R40_12.2@117.663,110.928 C25_12.2@117.663,108.907
  Bottom Layer w0.3: v1(63.754,56.769) 63.754,91.491 70.561,98.298 v1(105.664,98.298) ; v1(103.648,105.632) 105.775,103.505 106.075,103.505 106.195,103.625 106.927,103.625 v1(107.061,103.759) 110.744,103.759 111.186,104.201 v1(111.186,111.125)
+BalanceCommand_13: C25_13.2 C25_14.1 R40_13.2 R45_14.2 R47_14.2 U2.3 | length 114.3
  Top Layer w0.3: v1(60.183,92.964) 60.317,92.83 61.29,92.83 61.537,92.583 v1(67.31,92.583) ; v1(65.14,58.028) 65.14,57.838 64.897,57.596 64.897,53.848 66.068,52.677 U2.3@68.417,52.677 ; C25_14.1@73.627,107.107 73.881,106.853 73.881,106.172 74.113,105.94 76.349,105.94 76.586,106.177 R45_14.2@76.586,107.057 R47_14.2@79.219,107.057 ; R47_14.2@79.52,107.057 79.92,106.657 79.92,105.647 80.518,105.049 v1(80.518,104.902) ; v1(89.168,111.125) 89.256,111.213 95.36,111.213 R40_13.2@95.645,110.928 C25_13.2@95.645,108.907
  Bottom Layer w0.3: v1(60.183,92.964) 60.437,92.964 60.452,93.815 60.452,99.187 64.77,103.505 80.518,103.505 ; v1(65.14,58.028) 65.14,58.217 64.897,58.46 64.897,90.17 v1(67.31,92.583) ; v1(80.518,104.902) 80.518,103.505 ; v1(89.168,111.125) 89.168,106.313 86.36,103.505 80.518,103.505
+BalanceCommand_14: C25_14.2 C25_15.1 R40_14.2 R45_15.2 R47_15.2 U2.2 | length 95.6
  Top Layer w0.3: C25_15.1@51.609,107.107 51.882,106.834 51.882,106.233 52.212,105.903 54.392,105.903 54.568,106.079 R45_15.2@54.568,107.057 57.201,107.057 R47_15.2@57.351,107.057 ; R47_15.2@57.276,106.982 60.531,106.982 60.88,106.633 v1(60.88,105.664) ; v1(59.309,90.805) 60.325,89.789 v1(66.294,89.789) ; v1(66.167,56.896) 66.04,56.769 66.04,53.721 66.584,53.177 U2.2@68.417,53.177 ; v1(67.15,111.125) 67.238,111.213 73.342,111.213 R40_14.2@73.627,110.928 C25_14.2@73.627,108.907
  Bottom Layer w0.3: v1(59.309,90.805) 59.309,90.823 58.801,91.331 58.801,103.632 60.833,105.664 v1(60.88,105.664) 60.988,105.556 61.83,105.556 62.611,104.775 66.294,104.775 67.15,105.631 v1(67.15,111.125) ; v1(66.167,56.896) 66.294,57.023 v1(66.294,89.789)
+BalanceCommand_15: C25_15.2 C25_16.1 R40_15.2 R45_16.2 R47_16.2 U2.1 | length 126.1
  Top Layer w0.3: C25_16.1@29.591,107.107 29.845,106.853 29.845,106.172 30.339,105.678 ; v1(29.718,90.678) 38.735,90.678 43.195,86.218 67.292,86.218 67.3,86.226 67.684,86.226 v1(67.818,86.36) ; v1(29.718,104.14) 29.718,104.241 30.339,104.862 30.339,105.678 ; v1(34.671,105.029) 35.484,105.842 R47_16.2@35.484,107.057 ; R47_16.2@35.183,107.057 R45_16.2@32.55,107.057 32.55,105.854 32.374,105.678 30.339,105.678 ; v1(37.719,102.489) 37.846,102.489 39.183,103.826 39.183,107.636 42.672,111.125 v1(45.132,111.125) 45.22,111.213 51.324,111.213 R40_15.2@51.609,110.928 C25_15.2@51.609,108.907 ; v1(67.691,56.769) 66.965,56.043 66.965,54.229 67.517,53.677 U2.1@68.417,53.677
  Bottom Layer w0.3: v1(29.718,90.678) v1(29.718,104.14) ; v1(34.671,105.029) 34.732,104.968 34.732,104.079 36.322,102.489 v1(37.719,102.489) ; v1(67.691,56.769) 67.691,86.233 v1(67.818,86.36)
+BalanceCommand_16: C25_16.2 R40_16.2 R65.1 U2.48 | length 121
  Top Layer w0.3: v1(23.114,111.125) 23.202,111.213 29.306,111.213 R40_16.2@29.591,110.928 C25_16.2@29.591,108.907 ; v1(28.067,92.964) 30.48,95.377 36.957,95.377 38.227,96.647 53.848,96.647 ; R65.1@51.023,90.569 51.041,90.551 v1(53.721,90.551) ; v1(53.848,95.885) 53.848,96.647 ; v1(69.088,94.615) 67.056,96.647 53.848,96.647 ; v1(69.215,59.309) 69.767,58.757 U2.48@69.767,55.027
  Bottom Layer w0.3: v1(23.114,111.125) 24.892,109.347 24.892,104.013 28.067,100.838 v1(28.067,92.964) ; v1(53.721,90.551) 53.848,90.678 v1(53.848,95.885) ; v1(69.088,94.615) 69.088,59.436 v1(69.215,59.309)
+BAT: C11.1 C12.2 C14.2 C20.1 R28.2 TP1.1 U2.47 | length 22.4
  Top Layer w0.3: U2.47@70.267,55.027 70.267,59.908 69.723,60.452 C12.2@69.723,61.468 C14.2@72.517,61.468 75.361,61.468 78.028,64.135 TP1.1@78.359,64.135 78.359,61.207 C20.1@78.733,60.833 C11.1@78.733,58.293
+Cell_1: J1.31 J3.2 Q2_2.3 R40_1.1 R41_1.1 R42_1.1 R43_1.1 R44_1.1 R46_2.1 R47_2.1 | length 87.3
  Top Layer w0.3: 26.698,11.176 26.802,11.28 R40_1.1@26.802,12.516 ; v2(42.555,15.494) 42.555,14.478 43.444,13.589 44.79,13.589 ; R46_2.1@44.78,12.643 44.79,12.653 44.79,13.589 ; R47_2.1@44.79,14.487 44.79,13.589
  Top Layer w1: J3.2@14.859,24.511 17.796,21.574 41.672,21.574 42.434,20.812 42.434,15.615 v2(42.555,15.494) 39.956,15.494 39.37,14.908 39.37,10.795 ; v2(52.588,14.097) 52.859,14.097 53.321,13.635 Q2_2.3@55.32,13.635
  Bottom Layer w0.3: J3.2@15.113,24.511 29.21,38.608 J1.31@29.21,43.561
  Bottom Layer w1: v2(42.555,15.494) 42.826,15.494 44.223,14.097 v2(52.588,14.097)
  other v1: 19.304,7.112 22.479,7.112 25.527,7.112 28.575,7.112 31.623,7.112 34.671,7.112 37.973,7.112 19.304,8.954 37.973,8.954 19.304,10.795 37.973,10.795
+Cell_2: J1.29 J3.3 Q2_3.3 R40_2.1 R41_2.1 R42_2.1 R43_2.1 R44_2.1 R46_3.1 R47_3.1 | length 110.2
  Top Layer w0.3: 48.679,11.176 48.783,11.28 R40_2.1@48.783,12.516 ; v2(64.536,15.494) 64.536,14.478 65.425,13.589 66.771,13.589 ; R46_3.1@66.761,12.643 66.771,12.653 66.771,13.589 ; R47_3.1@66.771,14.487 66.771,13.589
  Top Layer w1: J3.3@14.859,29.591 20.447,29.591 26.797,23.241 63.191,23.241 64.536,21.896 v2(64.536,15.494) 61.937,15.494 61.351,14.908 61.351,10.795 ; 60.97,9.525 61.224,9.779 ; v2(74.569,14.097) 74.84,14.097 75.302,13.635 Q2_3.3@77.301,13.635
  Bottom Layer w0.3: J3.3@15.113,29.591 15.613,29.591 25.781,39.759 25.781,42.672 J1.29@29.21,46.101
  Bottom Layer w1: v2(64.536,15.494) 64.807,15.494 66.204,14.097 v2(74.569,14.097)
  other v1: 41.285,7.112 44.46,7.112 47.508,7.112 50.556,7.112 53.604,7.112 56.652,7.112 59.954,7.112 41.285,8.954 59.954,8.954 41.285,10.795 59.954,10.795
+Cell_3: J1.27 J3.4 Q2_4.3 R40_3.1 R41_3.1 R42_3.1 R43_3.1 R44_3.1 R46_4.1 R47_4.1 | length 129.8
  Top Layer w0.3: 70.66,11.176 70.764,11.28 R40_3.1@70.764,12.516 ; v2(86.517,15.494) 86.517,14.478 87.406,13.589 88.752,13.589 ; R46_4.1@88.742,12.643 88.752,12.653 88.752,13.589 ; R47_4.1@88.752,14.487 88.752,13.589
  Top Layer w1: J3.4@14.859,34.671 20.066,34.671 30.014,24.723 80.814,24.723 86.326,19.211 86.326,15.685 v2(86.517,15.494) 83.918,15.494 83.332,14.908 83.332,10.795 ; 82.951,9.525 83.205,9.779 ; v2(96.55,14.097) 96.821,14.097 97.283,13.635 Q2_4.3@99.282,13.635
  Bottom Layer w0.3: J3.4@15.113,34.671 15.24,34.671 J1.27@29.21,48.641
  Bottom Layer w1: v2(86.517,15.494) 86.788,15.494 88.185,14.097 v2(96.55,14.097)
  other v1: 63.266,7.112 66.441,7.112 69.489,7.112 72.537,7.112 75.585,7.112 78.633,7.112 81.935,7.112 63.266,8.954 81.935,8.954 63.266,10.795 81.935,10.795
+Cell_4: J1.25 J3.5 Q2_5.3 R40_4.1 R41_4.1 R42_4.1 R43_4.1 R44_4.1 R46_5.1 R47_5.1 | length 152.1
  Top Layer w0.3: 92.641,11.176 92.745,11.28 R40_4.1@92.745,12.516 ; v2(108.498,15.494) 108.498,14.478 109.387,13.589 110.733,13.589 ; R46_5.1@110.723,12.643 110.733,12.653 110.733,13.589 ; R47_5.1@110.733,14.487 110.733,13.589
  Top Layer w1: J3.5@14.859,39.751 18.034,39.751 31.58,26.205 82.38,26.205 89.281,19.304 107.442,19.304 108.22,18.526 108.22,18.023 108.307,17.936 108.307,15.685 v2(108.498,15.494) 105.899,15.494 105.313,14.908 105.313,10.795 ; v2(118.531,14.097) 118.802,14.097 119.264,13.635 Q2_5.3@121.263,13.635
  Bottom Layer w0.3: J3.5@15.113,39.751 15.613,39.751 27.043,51.181 J1.25@29.21,51.181
  Bottom Layer w1: v2(108.498,15.494) 108.769,15.494 110.166,14.097 v2(118.531,14.097)
  other v1: 85.247,7.112 88.422,7.112 91.47,7.112 94.518,7.112 97.566,7.112 100.614,7.112 103.916,7.112 85.247,8.954 103.916,8.954 85.247,10.795 103.916,10.795
+Cell_5: J1.23 J3.6 Q2_6.3 R40_5.1 R41_5.1 R42_5.1 R43_5.1 R44_5.1 R46_6.1 R47_6.1 | length 176.1
  Top Layer w0.3: 114.622,11.176 114.726,11.28 R40_5.1@114.726,12.516 ; v2(130.479,15.494) 130.479,14.478 131.368,13.589 132.714,13.589 ; R46_6.1@132.704,12.643 132.714,12.653 132.714,13.589 ; R47_6.1@132.714,14.487 132.714,13.589
  Top Layer w1: J3.6@14.859,44.831 17.575,44.831 18.161,44.245 18.161,43.18 33.655,27.686 83.693,27.686 90.551,20.828 128.524,20.828 130.479,18.873 v2(130.479,15.494) 127.88,15.494 127.294,14.908 127.294,10.795 ; v2(140.512,14.097) 140.783,14.097 141.245,13.635 Q2_6.3@143.244,13.635
  Bottom Layer w0.3: J3.6@15.113,44.831 18.487,44.831 27.377,53.721 J1.23@29.21,53.721
  Bottom Layer w1: v2(130.479,15.494) 130.75,15.494 132.147,14.097 v2(140.512,14.097)
  other v1: 107.228,7.112 110.403,7.112 113.451,7.112 116.499,7.112 119.547,7.112 122.595,7.112 125.897,7.112 107.228,8.954 125.897,8.954 107.228,10.795 125.897,10.795
+Cell_6: J1.21 J3.7 Q2_7.3 R40_6.1 R41_6.1 R42_6.1 R43_6.1 R44_6.1 R46_7.1 R47_7.1 | length 201.2
  Top Layer w0.3: 136.603,11.176 136.707,11.28 R40_6.1@136.707,12.516 ; v2(152.46,15.494) 152.46,14.478 153.349,13.589 154.695,13.589 ; R46_7.1@154.685,12.643 154.695,12.653 154.695,13.589 ; R47_7.1@154.695,14.487 154.695,13.589
  Top Layer w1: J3.7@14.859,49.911 18.669,49.911 20.193,48.387 20.193,43.815 34.84,29.168 84.624,29.168 91.186,22.606 148.844,22.606 152.46,18.99 v2(152.46,15.494) 149.861,15.494 149.275,14.908 149.275,10.795 ; v2(162.493,14.097) 162.764,14.097 163.226,13.635 Q2_7.3@165.225,13.635
  Bottom Layer w0.3: J3.7@15.113,49.911 15.613,49.911 18.941,53.239 25.299,53.239 28.199,56.139 29.088,56.139 J1.21@29.21,56.261
  Bottom Layer w1: v2(152.46,15.494) 152.731,15.494 154.128,14.097 v2(162.493,14.097)
  other v1: 129.209,7.112 132.384,7.112 135.432,7.112 138.48,7.112 141.528,7.112 144.576,7.112 147.878,7.112 129.209,8.954 147.878,8.954 129.209,10.795 147.878,10.795
+Cell_7: J1.19 J3.8 Q2_8.3 R40_7.1 R41_7.1 R42_7.1 R43_7.1 R44_7.1 R46_8.1 R47_8.1 | length 225.8
  Top Layer w0.3: 158.584,11.176 158.688,11.28 R40_7.1@158.688,12.516 ; v2(174.441,15.494) 174.441,14.478 175.33,13.589 176.676,13.589 ; R46_8.1@176.666,12.643 176.676,12.653 176.676,13.589 ; R47_8.1@176.676,14.487 176.676,13.589
  Top Layer w1: J3.8@14.859,54.991 19.812,54.991 21.844,52.959 21.844,44.958 36.152,30.65 85.809,30.65 92.202,24.257 168.275,24.257 173.228,19.304 173.228,16.707 v2(174.441,15.494) 171.842,15.494 171.256,14.908 171.256,10.795 ; v2(184.474,14.097) 184.745,14.097 185.207,13.635 Q2_8.3@187.206,13.635
  Bottom Layer w0.3: J3.8@15.113,54.991 25.4,54.991 J1.19@29.21,58.801
  Bottom Layer w1: v2(174.441,15.494) 174.712,15.494 176.109,14.097 v2(184.474,14.097)
  other v1: 151.19,7.112 154.365,7.112 157.413,7.112 160.461,7.112 163.509,7.112 166.557,7.112 169.859,7.112 151.19,8.954 169.859,8.954 151.19,10.795 169.859,10.795
+Cell_8: J1.17 J3.9 Q2_9.3 R40_8.1 R41_8.1 R42_8.1 R43_8.1 R44_8.1 R46_9.1 R47_9.1 | length 349.7
  Top Layer w0.3: 180.565,11.176 180.669,11.28 R40_8.1@180.669,12.516 ; R47_9.1@189.61,108.957 189.61,109.855 ; R46_9.1@189.62,110.801 189.61,110.791 189.61,109.855 ; v1(195.58,110.236) 194.564,109.22 192.458,109.22 192.133,109.545 190.344,109.545 190.034,109.855 189.61,109.855
  Top Layer w1: J3.9@15.113,60.071 19.812,60.071 24.511,55.372 24.511,44.577 37.068,32.02 88.249,32.02 94.361,25.908 185.617,25.908 193.11,18.415 193.11,9.779 192.856,9.525 ; Q2_9.3@178.953,109.809 v2(181.512,109.809)
  Bottom Layer w0.3: J3.9@15.113,60.071 27.94,60.071 J1.17@29.21,61.341
  Bottom Layer w1: v2(181.512,109.809) 190.731,109.809 191.32,109.22 194.564,109.22 v1(195.58,110.236) 195.58,109.22 200.406,104.394 200.406,29.464 193.167,22.225 v2(193.167,17.907)
  other v1: 173.171,7.112 176.346,7.112 179.394,7.112 182.442,7.112 185.49,7.112 188.538,7.112 191.84,7.112 173.171,8.954 191.84,8.954 173.171,10.795 191.84,10.795
+Cell_9: J1.15 J3.10 Q2_10.3 R40_9.1 R41_9.1 R42_9.1 R43_9.1 R44_9.1 R46_10.1 R47_10.1 | length 245.6
  Top Layer w0.3: R47_10.1@167.592,108.957 167.592,109.855 ; R46_10.1@167.602,110.801 167.592,110.791 167.592,109.855 ; v2(169.573,109.22) 169.248,109.545 168.326,109.545 168.016,109.855 167.592,109.855 ; R40_9.1@185.617,110.928 185.617,112.517
  Top Layer w1: J3.10@15.113,65.151 19.304,65.151 26.035,71.882 26.035,82.804 27.051,83.82 37.338,83.82 39.497,81.661 39.497,71.882 43.307,68.072 60.198,68.072 65.659,73.533 88.392,73.533 93.726,78.867 98.171,78.867 109.347,90.043 130.556,90.043 136.271,95.758 136.271,99.441 138.303,101.473 168.656,101.473 169.573,102.39 v2(169.573,109.22) ; Q2_10.3@156.935,109.809 v2(159.494,109.809) ; 171.318,109.029 169.764,109.029 v2(169.573,109.22) ; 173.162,112.522 173.162,109.806 172.576,109.22 v2(169.573,109.22)
  Bottom Layer w0.3: J3.10@15.113,65.151 27.94,65.151 J1.15@29.21,63.881
  Bottom Layer w1: v2(159.494,109.809) 168.713,109.809 169.302,109.22 v2(169.573,109.22)
  other v1: 174.319,112.649 177.494,112.649 180.542,112.649 183.59,112.649 186.638,112.649 189.686,112.649 193.1,112.649 174.319,114.427 193.1,114.427 174.319,116.205 193.1,116.205
+Cell_10: J1.13 J2.1 Q2_11.3 R40_10.1 R41_10.1 R42_10.1 R43_10.1 R44_10.1 R46_11.1 R47_11.1 | length 227
  Top Layer w0.3: R47_11.1@145.574,108.957 145.574,109.855 ; R46_11.1@145.584,110.801 145.574,110.791 145.574,109.855 ; v2(147.555,109.22) 147.23,109.545 146.308,109.545 145.998,109.855 145.574,109.855 ; R40_10.1@163.599,110.928 163.599,112.517
  Top Layer w1: J2.1@14.859,73.533 21.336,73.533 23.876,76.073 23.876,83.439 26.416,85.979 38.608,85.979 41.402,83.185 41.402,72.517 43.765,70.154 59.74,70.154 65.024,75.438 87.503,75.438 92.837,80.772 96.774,80.772 109.22,93.218 128.905,93.218 132.461,96.774 132.461,99.695 136.779,104.013 146.558,104.013 147.555,105.01 v2(147.555,109.22) ; Q2_11.3@134.917,109.809 v2(137.476,109.809) ; 149.3,109.029 147.746,109.029 v2(147.555,109.22) ; 151.144,112.522 151.144,109.806 150.558,109.22 v2(147.555,109.22)
  Bottom Layer w0.3: J2.1@14.859,73.533 22.098,73.533 J1.13@29.21,66.421
  Bottom Layer w1: v2(137.476,109.809) 146.695,109.809 147.284,109.22 v2(147.555,109.22) ; 169.364,106.149 171.327,108.112 171.327,111.928 171.105,112.15 171.105,112.626 v1(171.082,112.649)
  other v1: 152.301,112.649 155.476,112.649 158.524,112.649 161.572,112.649 164.62,112.649 167.668,112.649 152.301,114.427 171.082,114.427 152.301,116.205 171.082,116.205
+Cell_11: J1.11 J2.2 Q2_12.3 R40_11.1 R41_11.1 R42_11.1 R43_11.1 R44_11.1 R46_12.1 R47_12.1 | length 187.4
  Top Layer w0.3: R47_12.1@123.556,108.957 123.556,109.855 ; R46_12.1@123.566,110.801 123.556,110.791 123.556,109.855 ; v2(125.537,109.22) 125.212,109.545 124.29,109.545 123.98,109.855 123.556,109.855 ; R40_11.1@141.581,110.928 141.581,112.517
  Top Layer w1: J2.2@14.859,78.613 18.796,78.613 21.717,81.534 21.717,84.963 25.527,88.773 38.989,88.773 42.799,84.963 67.442,84.963 67.839,84.566 78.804,84.566 80.55,82.82 95.774,82.82 108.712,95.758 128.002,95.758 128.588,96.344 128.588,103.242 125.537,106.292 v2(125.537,109.22) ; Q2_12.3@112.899,109.809 v2(115.458,109.809) ; 127.282,109.029 125.728,109.029 v2(125.537,109.22) ; 129.126,112.522 129.126,109.806 128.54,109.22 v2(125.537,109.22)
  Bottom Layer w0.3: J2.2@14.859,78.613 19.558,78.613 J1.11@29.21,68.961
  Bottom Layer w1: v2(115.458,109.809) 124.677,109.809 125.266,109.22 v2(125.537,109.22)
  other v1: 130.283,112.649 133.458,112.649 136.506,112.649 139.554,112.649 142.602,112.649 145.65,112.649 149.064,112.649 130.283,114.427 149.064,114.427 130.283,116.205 149.064,116.205
+Cell_12: J1.9 J2.3 Q2_13.3 R40_12.1 R41_12.1 R42_12.1 R43_12.1 R44_12.1 R46_13.1 R47_13.1 | length 150.3
  Top Layer w0.3: R47_13.1@101.538,108.957 101.538,109.855 ; R46_13.1@101.548,110.801 101.538,110.791 101.538,109.855 ; v2(103.519,109.22) 103.194,109.545 102.272,109.545 101.962,109.855 101.538,109.855 ; R40_12.1@119.563,110.928 119.563,112.517
  Top Layer w1: J2.3@14.859,83.693 18.796,83.693 19.812,84.709 19.812,86.995 29.337,96.52 36.068,96.52 37.338,97.79 82.169,97.79 84.455,100.076 102.235,100.076 104.902,102.743 104.902,109.22 ; Q2_13.3@90.881,109.809 v2(93.44,109.809) ; v2(103.519,109.22) 104.902,109.22 ; 107.108,112.522 107.108,109.806 106.522,109.22 104.902,109.22
  Bottom Layer w0.3: J2.3@14.859,83.693 15.225,83.327 17.384,83.327 J1.9@29.21,71.501
  Bottom Layer w1: v2(93.44,109.809) 102.659,109.809 103.248,109.22 v2(103.519,109.22)
  other v1: 108.265,112.649 111.44,112.649 114.488,112.649 117.536,112.649 120.584,112.649 123.632,112.649 127.046,112.649 108.265,114.427 127.046,114.427 108.265,116.205 127.046,116.205
+Cell_13: J1.7 J2.4 Q2_14.3 R40_13.1 R41_13.1 R42_13.1 R43_13.1 R44_13.1 R46_14.1 R47_14.1 | length 134
  Top Layer w0.3: R47_14.1@79.52,108.957 79.52,109.855 ; R46_14.1@79.53,110.801 79.52,110.791 79.52,109.855 ; v2(81.501,109.22) 81.176,109.545 80.254,109.545 79.944,109.855 79.52,109.855 ; R40_13.1@97.545,110.928 97.545,112.517
  Top Layer w1: J2.4@14.859,88.773 18.034,88.773 27.686,98.425 35.433,98.425 36.576,99.568 80.137,99.568 81.772,101.203 81.772,106.678 81.692,106.758 81.692,109.029 v2(81.501,109.22) 84.504,109.22 85.09,109.806 85.09,112.522 ; Q2_14.3@68.863,109.809 v2(71.422,109.809)
  Bottom Layer w0.3: J2.4@14.859,88.773 15.359,88.773 18.669,85.463 18.669,84.582 J1.7@29.21,74.041
  Bottom Layer w1: v2(71.422,109.809) 80.641,109.809 81.23,109.22 v2(81.501,109.22) ; 102.851,106.608 103.129,106.886 104.047,106.886 105.273,108.112 105.273,111.928 105.051,112.15 105.051,112.626 v1(105.028,112.649)
  other v1: 86.247,112.649 89.422,112.649 92.47,112.649 95.518,112.649 98.566,112.649 101.614,112.649 86.247,114.427 105.028,114.427 86.247,116.205 105.028,116.205